# Altium PCB PCB.PcbDoc
Units mm, origin at the board's own origin, x right, y up, seen from the top; angles counter-clockwise.
Board outline 30.6 x 18.8 mm, 2 copper layers (Top Layer, Bottom Layer), stack 1.581 mm thick; 7 components, 13 nets, 50 pads, 13 vias.
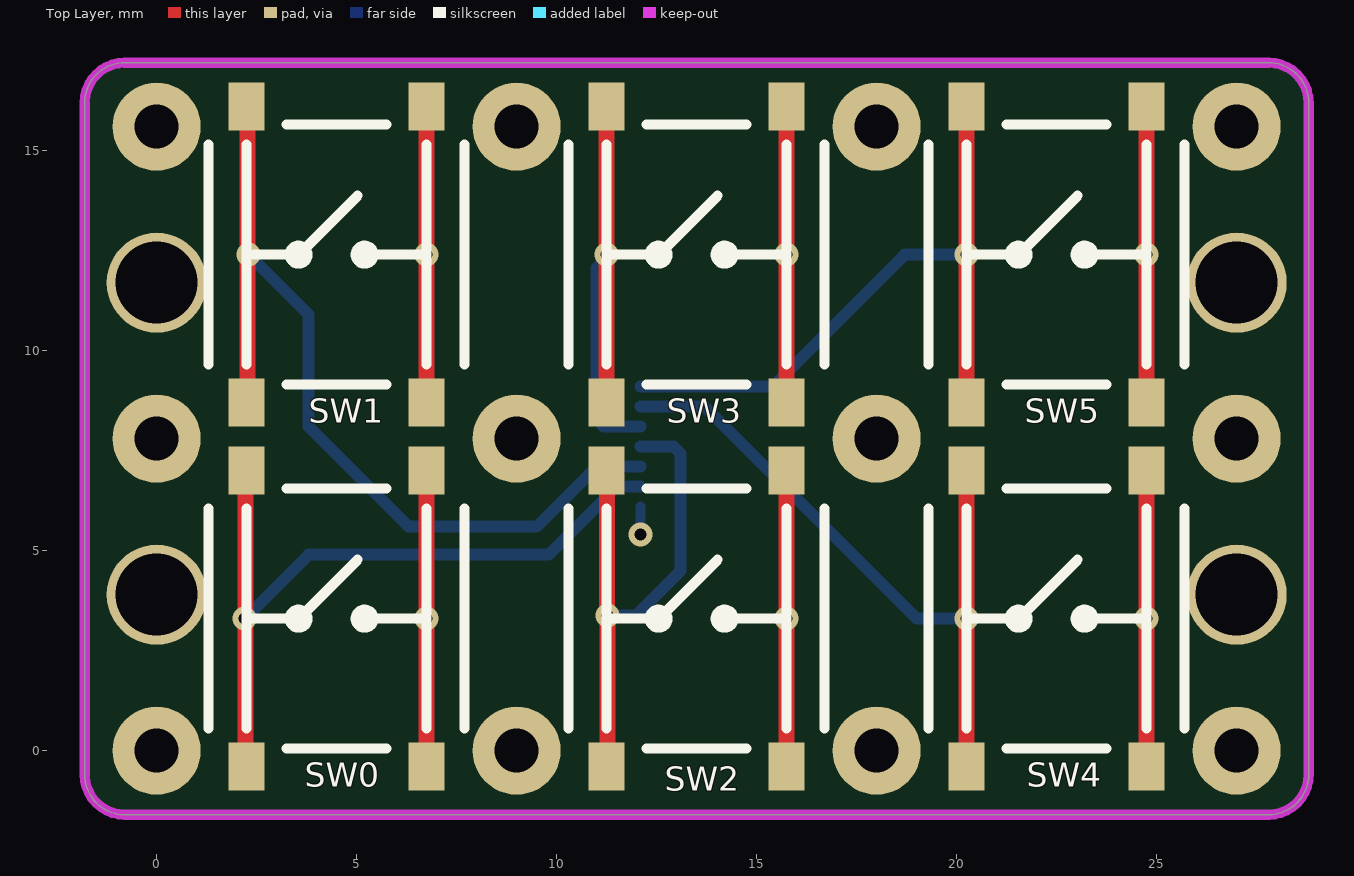
[diagram p0: Top Layer view]
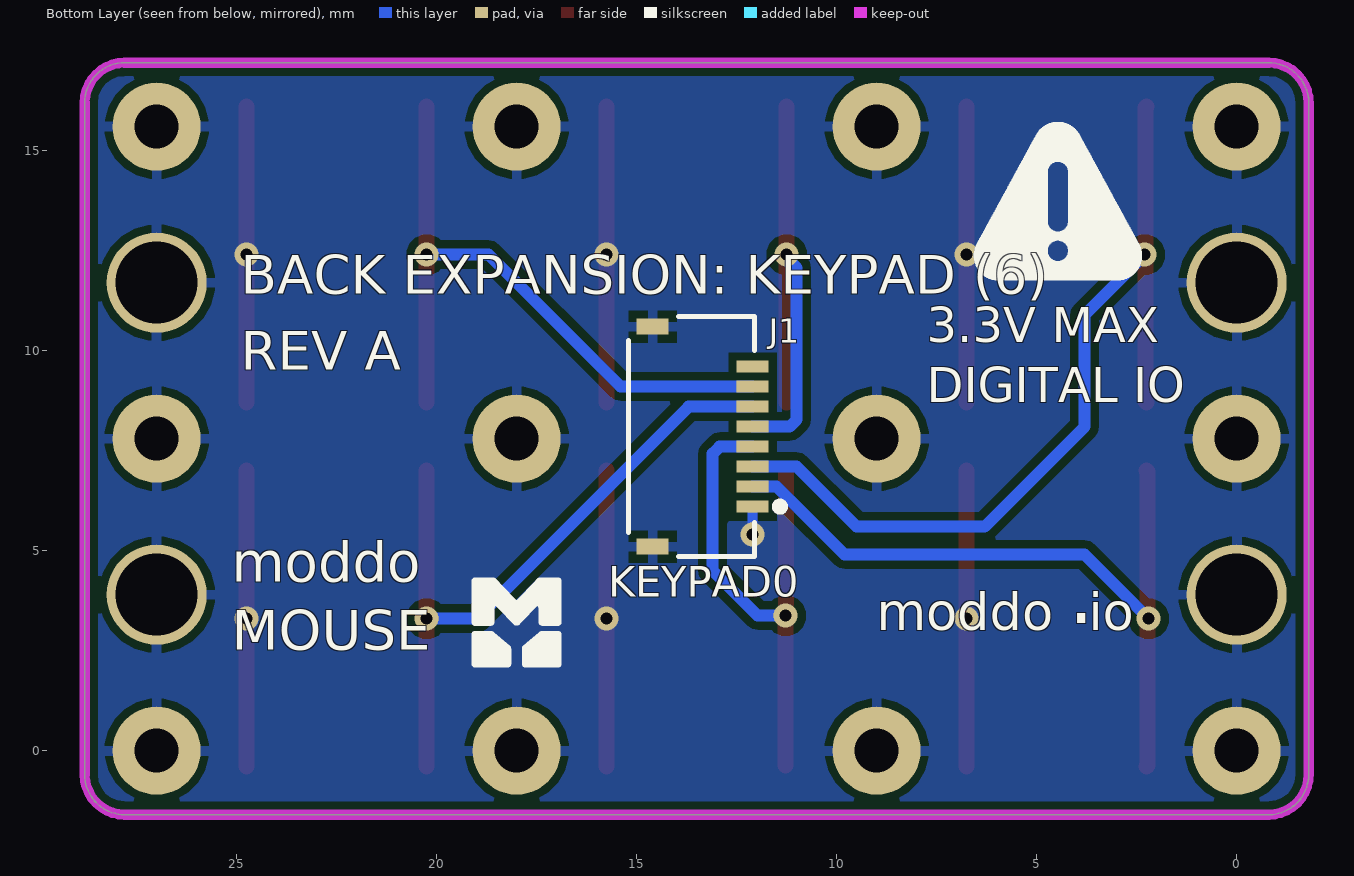
[diagram p1: Bottom Layer view, seen from below]
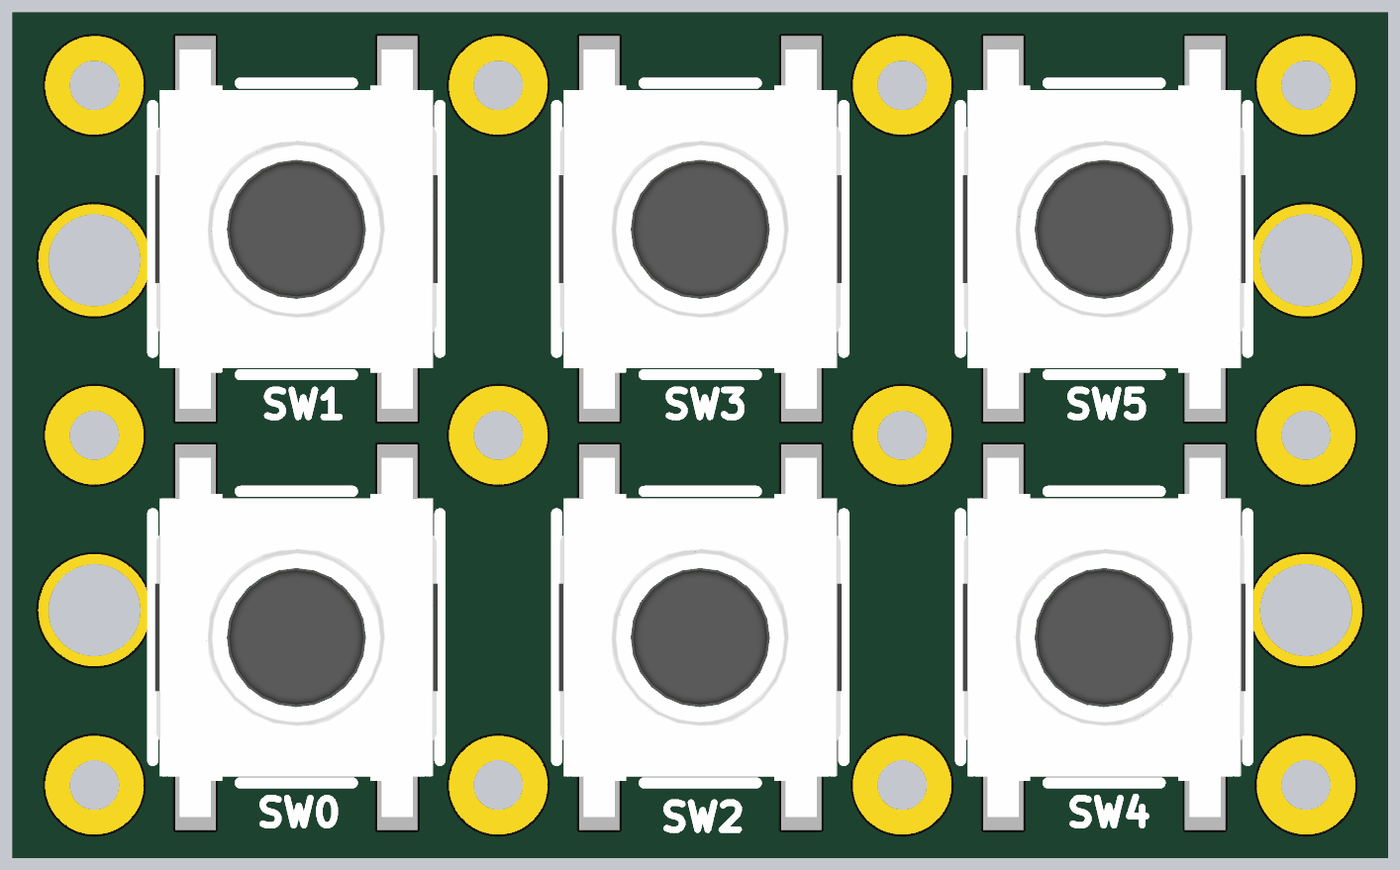
[diagram p2: 3D render of the assembled board from above, using the file's embedded part models]

## Layer stack, top to bottom
Top Solder: solder mask 0.0102, Solder Resist, Dk 3.5
Top Layer: signal copper 0.0356
Dielectric 1: dielectric 1.51, FR-4, Dk 4.8
Bottom Layer: signal copper 0.0356
Bottom Solder: solder mask 0.0102, Solder Resist, Dk 3.5

## Board outline
-0.8,-1.6 cw(c-0.8,-0.6) -1.8,-0.6 -1.8,16.2 cw(c-0.8,16.2) -0.8,17.2 27.8,17.2 cw(c27.8,16.2) 28.8,16.2 28.8,-0.6 cw(c27.8,-0.6) 27.8,-1.6

## Design rules (kind name [scope] priority, off if disabled: settings)
BoardOutlineClearance [All] p1: gap=0.2 ignorepadtopadclearanceinfootprint=FALSE
Clearance GND_bot [InNamedPolygon('GND_bot')] p1: gap=0.2 ignorepadtopadclearanceinfootprint=FALSE
Clearance GND_top [InNamedPolygon('GND_top')] p2: gap=0.1 ignorepadtopadclearanceinfootprint=FALSE
Clearance [All] p3: gap=0.2 ignorepadtopadclearanceinfootprint=FALSE
HoleSize [All] p1: absolutevalues=TRUE maxlimit=20 minlimit=0.025 maxpercent=80.000 minpercent=20.000
MinimumSolderMaskSliver [All] p1: minsoldermaskwidth=0.05
PolygonConnect [All] p1: thpad.connectstyle=Relief thpad.reliefconductorwidth=0.254 thpad.reliefentries=4 thpad.polygonreliefangle="90 Angle" thpad.airgapwidth=0.2 smdpad.connectstyle=Relief smdpad.reliefconductorwidth=0.254 smdpad.reliefentries=4 smdpad.polygonreliefangle="90 Angle" smdpad.airgapwidth=0.2 via.connectstyle=Direct via.reliefconductorwidth=0.254 via.reliefentries=4 via.polygonreliefangle="90 Angle" via.airgapwidth=0.254
RoutingVias [All] p1: holewidth=0.3 width=0.4 viastyle="Through Hole" minholewidth=0.3 minwidth=0.4 maxholewidth=2 maxwidth=10
SilkToSilkClearance [All] p1: silktosilkclearance=0.01
SilkToSolderMaskClearance [IsPad] p1: minsilkscreentomaskgap=0.001 clearancetoexposedcopper=TRUE
SolderMaskExpansion [All] p1: expansion=0.05 istentingtop=FALSE
SupplyNets "Schematic Supply Nets_1" [InNet('GND')] p1: voltage=0.000
UnRoutedNet [All] p1: checkbadconnections=TRUE
Width [All] p1: maxlimit=2.54 minlimit=0.089 preferedwidth=0.254
25 further rules are at their usual default settings.

## Components (designator, comment, footprint, x,y, rotation, side; value= is the part's Value field where it differs from the comment)
J1 "2328702-8" 2328702-8 15.45,7.85 r270 bottom
SW0 "GT-TS090C-H031-L5" Switch_6_2mm_6_2mm_3_1mm 4.5,3.3 r90 top
SW1 "GT-TS090C-H031-L5" Switch_6_2mm_6_2mm_3_1mm 4.5,12.4 r90 top
SW2 "GT-TS090C-H031-L5" Switch_6_2mm_6_2mm_3_1mm 13.5,3.3 r90 top
SW3 "GT-TS090C-H031-L5" Switch_6_2mm_6_2mm_3_1mm 13.5,12.4 r90 top
SW4 "GT-TS090C-H031-L5" Switch_6_2mm_6_2mm_3_1mm 22.5,3.3 r90 top
SW5 "GT-TS090C-H031-L5" Switch_6_2mm_6_2mm_3_1mm 22.5,12.4 r90 top

## Footprints (in the part's own frame and the unit in brackets; to place one, negate y for a bottom-side part, rotate by r counter-clockwise, add the part's x,y. Pads: shape width x height; smd on the part's side, far side on the other; paste and mask are expansions set on the pad)
2328702-8 [mm]
  rect 0.3x0.8 smd mask+0.05: 1(1.75,3.35) 2(1.25,3.35) 3(0.75,3.35) 4(0.25,3.35) 5(-0.25,3.35) 6(-0.75,3.35) 7(-1.25,3.35) 8(-1.75,3.35)
  rect 0.4x0.8 smd mask+0.05: S1(2.75,0.85) S2(-2.75,0.85)
  silkscreen extent -3,0.25 3,4.13, body extent -3,0.25 3,4.08, height 1.06
Switch_6_2mm_6_2mm_3_1mm [mm]
  rect 1.2x0.9 smd mask+0.05: 1(-3.7,2.25) 2(3.7,2.25) 3(-3.7,-2.25) 4(3.7,-2.25)
  silkscreen extent -3.25,-3.2 3.25,3.2, body extent -4.01,-3.15 4,3.15, height 3.1

## Part data
J1: "FFC/FPC Connector, 8 Contact(s), 1 Row(s), Right Angle, Solder Terminal, Natural Insulator", Actuator Color=Black, Flammability Rating="UL94 V-0", Housing Color=Natural, Manufacturer="TE Connectivity", Max Operating Temperature=85°C, Min Operating Temperature=-40°C, Operating Supply Voltage=50V, Actuator Material=Thermoplastic, Category="FFC / FPC", ComponentLink1Description=https://www.te.com/commerce/DocumentDelivery/DDEController?Action=srchrtrv&amp;DocNm=2328702&amp;DocType=Customer+Drawing&amp;DocLang=English&src-supplier=Digikey, ComponentLink1URL=https://www.te.com/commerce/DocumentDelivery/DDEController?Action=srchrtrv&amp;DocNm=2328702&amp;DocType=Customer+Drawing&amp;DocLang=English&src-supplier=Digikey, Connector System=Wire-to-Board, Contact Material="Copper Alloy", Contact Plating=Gold, Gender=Receptacle, Height=1mm, Housing Material=Thermoplastic, Length=6mm, Manufacturer Part Number=2328702-8, Mounting Technology="Surface Mount", Number of Contacts=8, Number of Positions=8, Number of Rows=1, Orientation="Right Angle", Packaging="Cut Tape", Plating=Gold, Pricing 1="28000=0.0961 (USD)", RoHS=Yes, Sealable="No (Without)", Series=-, Stock 1=56000, Supplier 1="Arrow Electronics", Supplier Part Number 1=2328702-8, Termination=Solder, Voltage Rating=50V
SW0 SW1 SW2 SW3 SW4 SW5: "Tactile Switch SPST 100gf 3.1mm SMD (SMT) Tab 6.2mm x 6.2mm Surface Mount", Manufacturer=G-Switch, Manufacturer Part Number=GT-TS090C-H031-L5

## Free pads (board coordinates)
  round 2.2 hole 1.1: ""(0,0) ""(0,7.8) ""(0,15.6) ""(9,0) ""(9,7.8) ""(9,15.6) ""(18,0) ""(18,7.8) ""(18,15.6) ""(27,0) ""(27,7.8) ""(27,15.6)
  round 2.5 hole 2.05: ""(0,3.9) ""(0,11.7) ""(27,3.9) ""(27,11.7)

## Via types
v1: diameter 0.6, hole 0.3, Top Layer to Bottom Layer, tented both sides, 13 vias

## Nets (pads, with @x,y where several pads share a name; then routed paths per layer and width w, separated by ;. In a path a pad name is that pad's centre, name@x,y a point inside that pad or via, vN(x,y) a via of type N, cw(c..) or ccw(c..) an arc to the next point about the centre after c; other vN are vias at no path point)
GND: J1.1 J1.S1 J1.S2 pad. SW0.3 SW0.4 SW1.3 SW1.4 SW2.3 SW2.4 SW3.3 SW3.4 SW4.3 SW4.4 SW5.3 SW5.4 | length 45.1
  Top Layer w0.4: SW0.3 SW0.4 ; SW1.3 SW1.4 ; SW2.3 SW2.4 ; SW3.3 SW3.4 ; SW4.3 SW4.4 ; SW5.3 SW5.4
  Bottom Layer w0.25: v1(12.1,5.4) J1.1
  other v1: 6.75,3.3 15.75,3.3 24.75,3.3 6.75,12.4 15.75,12.4 24.75,12.4
KEY0: J1.2 SW0.1 SW0.2 | length 18.7
  Top Layer w0.4: SW0.1 2.225,-0.375 2.225,3.275 v1(2.2,3.3) 2.225,3.325 2.225,6.975 SW0.2
  Bottom Layer w0.3: v1(2.2,3.3) 3.8,4.9 9.8,4.9 11.5,6.6 J1.2
KEY1: J1.3 SW1.1 SW1.2 | length 22.3
  Top Layer w0.4: SW1.1 2.275,8.725 2.275,12.375 v1(2.3,12.4) 2.275,12.425 2.275,16.075 SW1.2
  Bottom Layer w0.3: v1(2.3,12.4) 3.8,10.9 3.8,8.1 6.3,5.6 9.5,5.6 11,7.1 J1.3
KEY2: J1.4 SW2.1 SW2.2 | length 13.7
  Top Layer w0.4: SW2.2 11.263,6.987 11.263,3.388 v1(11.275,3.375) SW2.1@11.275,-0.375
  Bottom Layer w0.3: v1(11.275,3.375) 11.975,3.375 13.1,4.5 13.1,7.424 12.924,7.6 J1.4
KEY3: J1.5 SW3.1 SW3.2 | length 12.8
  Top Layer w0.4: SW3.1 v1(11.25,12.4) SW3.2
  Bottom Layer w0.3: v1(11.25,12.4) 11.25,12.319 11,12.069 11,8.276 11.176,8.1 J1.5
KEY4: J1.6 SW4.1 SW4.2 | length 17.7
  Top Layer w0.4: SW4.1 v1(20.25,3.3) SW4.2
  Bottom Layer w0.3: J1.6 13.7,8.6 19,3.3 v1(20.25,3.3)
KEY5: J1.7 SW5.1 SW5.2 | length 16.9
  Top Layer w0.4: SW5.1 v1(20.25,12.4) SW5.2
  Bottom Layer w0.3: J1.7 15.4,9.1 18.7,12.4 v1(20.25,12.4)
KEY6: 
KEY7: 
KEY8: 
KEY9: 
KEY10: 
KEY11: 
pads on no net: J1.8

## Polygon pours and split planes (outlines as drawn)
GND on Bottom Layer "GND_L02_P002" (solid, pour order 2): -0.8,-1.6 cw(c-0.8,-0.6) -1.8,-0.6 -1.8,16.2 cw(c-0.8,16.2) -0.8,17.2 27.8,17.2 cw(c27.8,16.2) 28.8,16.2 28.8,-0.6 cw(c27.8,-0.6) 27.8,-1.6

## Keep-outs
Keep-Out Layer:
  the board outline again, w0.254

## Silkscreen, mask and mechanical layers (free items; w line width, h text height)
Bottom Overlay:
  drawing of 4 lines, arcs and shapes, not listed
  text "BACK EXPANSION: KEYPAD (6)" at 24.9,11.1 h1.65
  text "REV A" at 24.9,9.2 h1.65
  text "3.3V MAX / DIGITAL IO" at 7.75,8.42 h1.5
  text "KEYPAD0" at 15.707,3.6 h1.3
  text "io" at 3.7,2.7 h1.6
  text "." at 4.2,2.7 h2.5
  text "moddo" at 9,2.7 h1.6
  text "moddo / MOUSE" at 25.118,2.196 h1.7